# Altium PCB GatewayModbus.PcbDoc
Units mm, origin at the board's own origin, x right, y up, seen from the top; angles counter-clockwise.
Board outline 24 x 53 mm, 2 copper layers (Top Layer, Bottom Layer); 60 components, 41 nets, 170 pads, 145 vias.
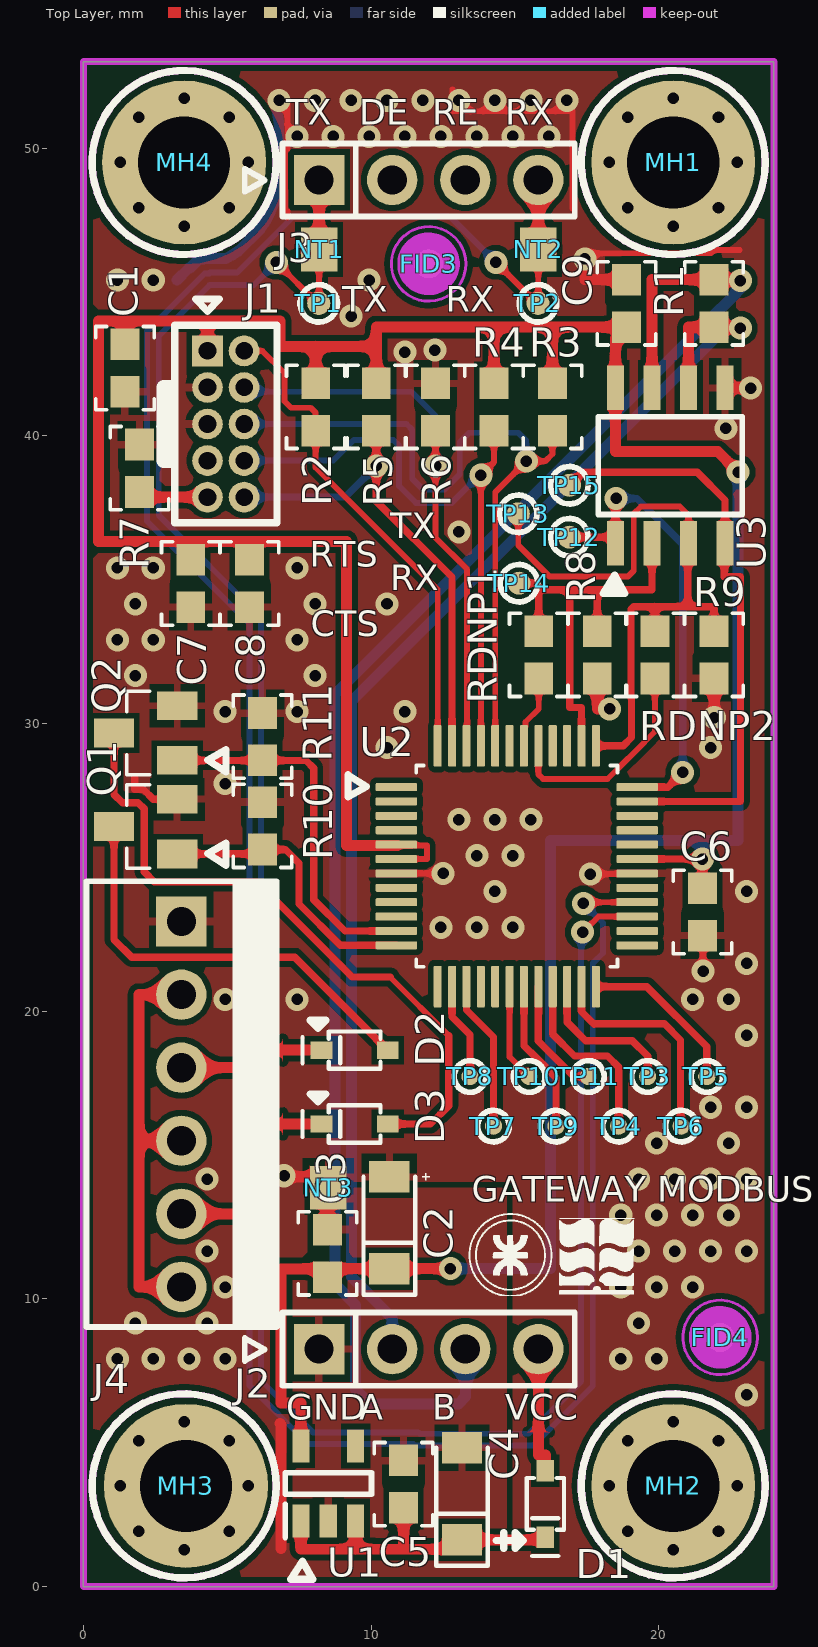
[diagram p0: Top Layer view]
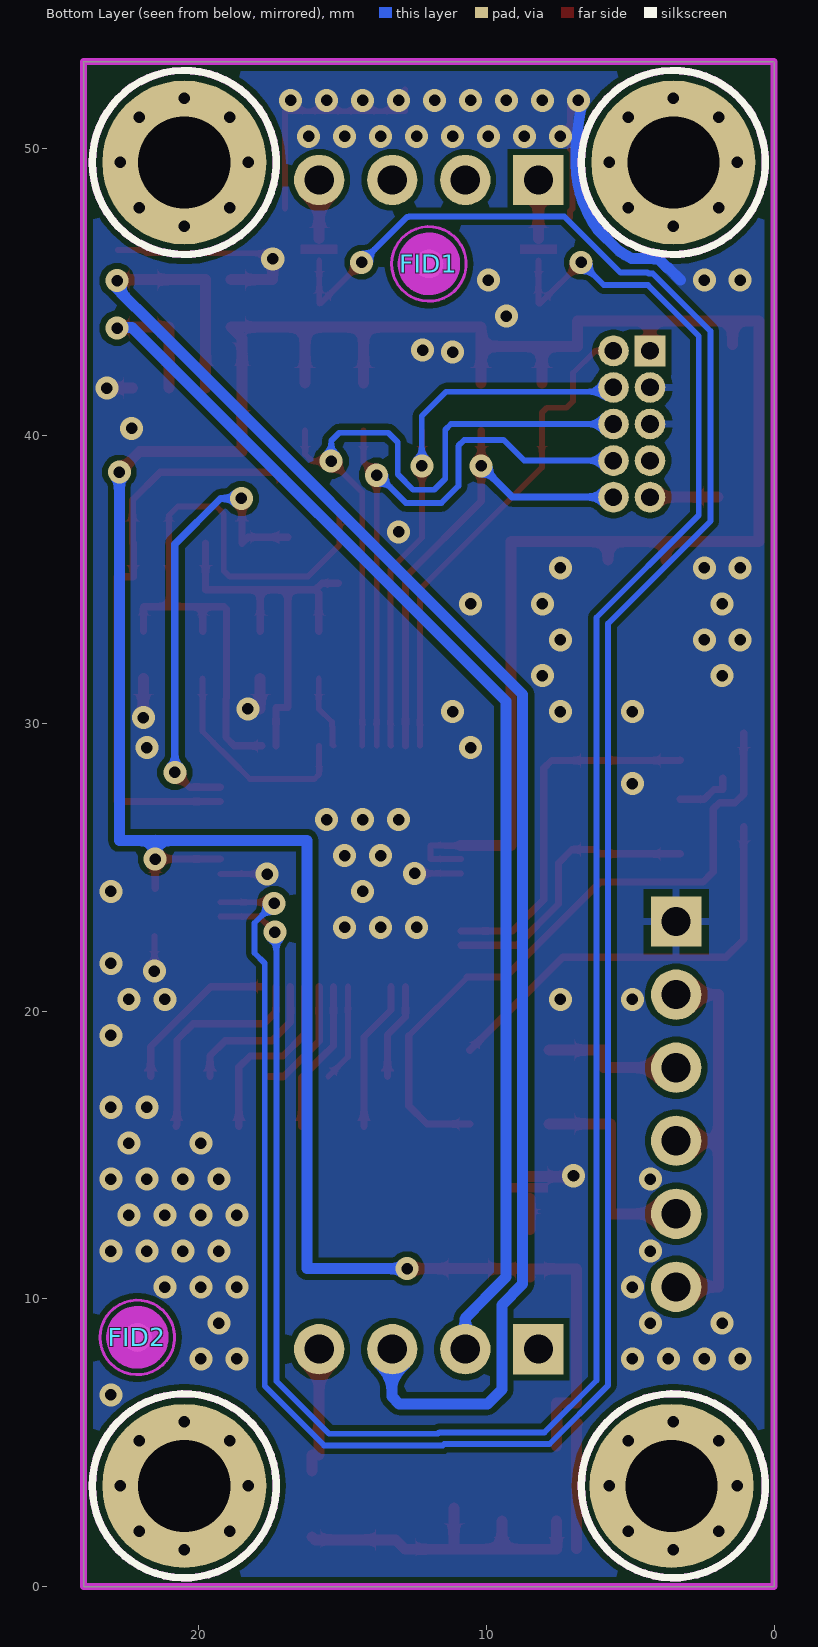
[diagram p1: Bottom Layer view, seen from below]

## Layer stack, top to bottom
Top Solder: solder mask 0.0102, Solder Resist, Dk 3.5
Top Layer: signal copper 0.0356
Dielectric 1: dielectric 0.32, FR-4, Dk 4.8
Bottom Layer: signal copper 0.0356
Bottom Solder: solder mask 0.0102, Solder Resist, Dk 3.5

## Board outline
0,0 0,53 24.003,53 24,53 24,0

## Design rules (kind name [scope] priority, off if disabled: settings)
Clearance [All] p1: gap=0.203 ignorepadtopadclearanceinfootprint=TRUE
PlaneClearance [All] p1: clearance=0.305
PlaneConnect [IsVia] p1: planeconnectstyle=Direct reliefexpansion=0.508 reliefentries=4 reliefconductorwidth=0.254 reliefairgap=0.254
PlaneConnect PlaneConnect_1 [All] p2: planeconnectstyle=Relief reliefexpansion=0.508 reliefentries=4 reliefconductorwidth=0.254 reliefairgap=0.254
PolygonConnect [All] p1: thpad.connectstyle=Relief thpad.reliefconductorwidth=0.254 thpad.reliefentries=4 thpad.polygonreliefangle="90 Angle" thpad.airgapwidth=0.254 smdpad.connectstyle=Relief smdpad.reliefconductorwidth=0.254 smdpad.reliefentries=4 smdpad.polygonreliefangle="90 Angle" smdpad.airgapwidth=0.254 via.connectstyle=Direct via.reliefconductorwidth=0.254 via.reliefentries=4 via.polygonreliefangle="90 Angle" via.airgapwidth=0.254
RoutingVias [All] p1: holewidth=0.711 width=1.27 viastyle="Through Hole" minholewidth=0.711 minwidth=1.27 maxholewidth=0.711 maxwidth=1.27 useviatemplates=TRUE viatemplateguid#1={3A806ADE-E63A-4A2F-AADA-EE6A29EC5604} viatemplatename#1=v80h40m0mx0
SolderMaskExpansion [All] p1: expansion=0.102 istentingtop=FALSE
Width [All] p1: maxlimit=0.381 minlimit=0.203 preferedwidth=0.254
28 further rules are at their usual default settings.

## Components (designator, comment, footprint, x,y, rotation, side; value= is the part's Value field where it differs from the comment)
C1 "100nF 16 X7R" CAPC0603 1.441,42.352 r90 top
C2 "10uF/16V" "CAP POL TANT 1206" 10.632,12.644 r270 top
C3 "100nF 16 X7R" CAPC0603 8.48,11.581 r270 top
C4 "10uF/16V" "CAP POL TANT 1206" 13.157,3.225 r270 top
C5 "100nF 16 X7R" CAPC0603 11.125,3.558 r270 top
C6 "100nF 16 X7R" CAPC0603 21.514,23.444 r90 top
C7 "100nF 16 X7R" CAPC0603 3.727,34.863 r90 top
C8 "100nF 16 X7R" CAPC0603 5.771,34.863 r90 top
C9 "100nF 16 X7R" CAPC0603 18.876,44.602 r90 top
D1 "1N4148" SOD323 16.053,2.87 r90 top
D2 "1N4148" SOD323 9.423,18.644 r0 top
D3 "1N4148" SOD323 9.423,16.078 r0 top
FID1 "Fiducial" Fiducial10-20 11.995,45.974 r90 bottom
FID2 "Fiducial" Fiducial10-20 22.13,8.658 r90 bottom
FID3 "Fiducial" Fiducial10-20 11.995,45.974 r90 top
FID4 "Fiducial" Fiducial10-20 22.13,8.658 r90 top
J1 "HEADER5x2-1.27mm" PAD10-2X05-HH 4.311,42.948 r270 top
J2 "PIN4" SIP4 12,8.252 r0 top locked
J3 "PIN4" SIP4 12,48.892 r0 top locked
J4 "MOLEX6" MOLEX6 3.404,23.114 r270 top
MH1 "M3 Mount Hole" M3_MOUNTING_HOLE#1 20.5,49.5 r0 top locked
MH2 "M3 Mount Hole" M3_MOUNTING_HOLE#1 20.5,3.5 r0 top locked
MH3 "M3 Mount Hole" M3_MOUNTING_HOLE#2 3.5,3.5 r0 top locked
MH4 "M3 Mount Hole" M3_MOUNTING_HOLE#1 3.5,49.5 r0 top locked
NT1 "Net-Tie" Net-Tie_50milWide_30milLong 8.19,46.479 r90 top net-tie
NT2 "Net-Tie" Net-Tie_50milWide_30milLong 15.81,46.479 r90 top net-tie
NT3 "Net-Tie" Net-Tie_50milWide_30milLong 8.505,13.863 r90 top net-tie
Q1 "AO3400A" SOT-23 2.157,26.416 r90 top
Q2 "AO3400A" SOT-23 2.157,29.667 r90 top
R1 "120.0 - 5%" RESC0603 21.917,44.602 r90 top
R2 "10.0K - 5%" RESC0603 8.071,41.003 r270 top
R3 "10.0K - 5%" RESC0603 16.3,41.003 r270 top
R4 "10.0K - 5%" RESC0603 14.268,41.003 r270 top
R5 "10.0K - 5%" RESC0603 10.179,41.003 r270 top
R6 "10.0K - 5%" RESC0603 12.236,41.003 r270 top
R7 "10.0K - 5%" RESC0603 1.949,38.872 r270 top
R8 "10.0K - 5%" RESC0603 17.86,32.385 r90 top
R9 "10.0K - 5%" RESC0603 21.917,32.385 r90 top
R10 "10.0K - 5%" RESC0603 6.223,26.441 r90 top
R11 "10.0K - 5%" RESC0603 6.223,29.54 r90 top
RDNP1 "10.0K - 5%" RESC0603 15.824,32.385 r90 top
RDNP2 "10.0K - 5%" RESC0603 19.863,32.385 r270 top
TP1 "" TP_SMD_Ø1.0mm 8.178,44.602 r180 top
TP2 "" TP_SMD_Ø1.0mm 15.798,44.602 r180 top
TP3 "" TP_SMD_Ø0.6mm 19.609,17.729 r180 top
TP4 "" TP_SMD_Ø0.6mm 18.601,16.002 r180 top
TP5 "" TP_SMD_Ø0.6mm 21.666,17.729 r180 top
TP6 "" TP_SMD_Ø0.6mm 20.777,16.002 r180 top
TP7 "" TP_SMD_Ø0.6mm 14.249,16.002 r180 top
TP8 "" TP_SMD_Ø0.6mm 13.437,17.729 r180 top
TP9 "" TP_SMD_Ø0.6mm 16.425,16.002 r180 top
TP10 "" TP_SMD_Ø0.6mm 15.494,17.729 r180 top
TP11 "" TP_SMD_Ø0.6mm 17.551,17.729 r180 top
TP12 "" TP_SMD_Ø1.0mm 16.891,36.474 r90 top
TP13 "" TP_SMD_Ø1.0mm 15.113,37.287 r90 top
TP14 "" TP_SMD_Ø1.0mm 15.138,34.874 r90 top
TP15 "" TP_SMD_Ø1.0mm 16.891,38.278 r90 top
U1 "AP7335A-50W-7" SOT-23-5 8.509,3.581 r90 top
U2 "PS32K116LFF0MLCR" LQFP48-NXP 15.062,25.037 r0 top value=Value
U3 "MAX485ESA+T" SOIC8 20.396,38.964 r90 top

## Footprints (in the part's own frame and the unit in brackets; to place one, negate y for a bottom-side part, rotate by r counter-clockwise, add the part's x,y. Pads: shape width x height; smd on the part's side, far side on the other; paste and mask are expansions set on the pad)
"CAP POL TANT 1206" [mm] "SMD Tantalum Capacitor 1206"
  rect 1.1x1.4 smd mask+0.076: 1(1.6,0) 2(-1.6,0)
  silkscreen extent -1.73,-0.9 2.5,1.4, body extent -1.73,-0.9 1.67,0.9, height 1.81
CAPC0603 [mm] "SMD Chip Ceramic Capacitor 0603"
  rect 1.1x1 smd mask+0.051: 1(-0.825,0) 2(0.825,0)
  silkscreen extent -1.45,-1.02 1.45,1.02, body extent -0.75,-0.4 0.75,0.4, height 0.55
Fiducial10-20 [mm]
  round 1 smd mask+0.5: 1(0,0)
  Top Layer keep-out circle w1.178: c0,0 r0.5
  Keep-Out Layer circle w0.1: c0,0 r1.296
LQFP48-NXP [mm]
  rrect25% 1.44x0.28 smd: 1(-4.185,2.75) 2(-4.185,2.25) 3(-4.185,1.75) 4(-4.185,1.25) 5(-4.185,0.75) 6(-4.185,0.25) 7(-4.185,-0.25) 8(-4.185,-0.75) 9(-4.185,-1.25) 10(-4.185,-1.75) 11(-4.185,-2.25) 12(-4.185,-2.75) 25(4.185,-2.75) 26(4.185,-2.25) 27(4.185,-1.75) 28(4.185,-1.25) 29(4.185,-0.75) 30(4.185,-0.25) 31(4.185,0.25) 32(4.185,0.75) 33(4.185,1.25) 34(4.185,1.75) 35(4.185,2.25) 36(4.185,2.75)
  rrect25% 0.28x1.44 smd: 13(-2.75,-4.185) 14(-2.25,-4.185) 15(-1.75,-4.185) 16(-1.25,-4.185) 17(-0.75,-4.185) 18(-0.25,-4.185) 19(0.25,-4.185) 20(0.75,-4.185) 21(1.25,-4.185) 22(1.75,-4.185) 23(2.25,-4.185) 24(2.75,-4.185) 37(2.75,4.185) 38(2.25,4.185) 39(1.75,4.185) 40(1.25,4.185) 41(0.75,4.185) 42(0.25,4.185) 43(-0.25,4.185) 44(-0.75,4.185) 45(-1.25,4.185) 46(-1.75,4.185) 47(-2.25,4.185) 48(-2.75,4.185)
  silkscreen extent -5.87,-3.5 3.5,3.5, body extent -4.5,-4.5 4.5,4.5, height 1.6
M3_MOUNTING_HOLE#1 [mm]
  round 5.7 hole 3.2: 1(0,0)
  Keep-Out Layer circle w0.254: c0,0 r3.2
  silkscreen extent -3.2,-3.2 3.2,3.2
M3_MOUNTING_HOLE#2 [mm]
  round 5.7 hole 3.2: 1(0.063,0)
  Keep-Out Layer circle w0.254: c0,0 r3.2
  silkscreen extent -3.2,-3.2 3.2,3.2
MOLEX6 [mm]
  rect 1.75x1.75 hole 1.016: 1(0,0)
  round 1.75 hole 1.016: 2(2.54,0) 3(5.08,0) 4(7.62,0) 5(10.16,0) 6(12.7,0)
  silkscreen extent -1.4,-3.3 14.1,3.3, body extent -1.27,-3.17 13.97,3.18, height 10.74
Net-Tie_50milWide_30milLong [mil]
  rect 30x50 smd paste-20 mask-20: 1(-15,0) 2(15,0)
  Top Layer region: -6,25 6,25 6,-25 -6,-25
PAD10-2X05-HH [mil] "Header 2x5 paso 0.05\""
  rect 42x42 hole 24: 1(0,0)
  round 42 hole 24: 2(0,50) 3(50,0) 4(50,50) 5(100,0) 6(100,50) 7(150,0) 8(150,50) 9(200,0) 10(200,50)
  silkscreen extent -71,-60 235,95, body extent -25,-33 225,85, height 185
RESC0603 [mm] "SMD Chip Resistor 0603"
  rect 1.1x1 smd mask+0.051: 1(-0.825,0) 2(0.825,0)
  silkscreen extent -1.45,-1.02 1.45,1.02, body extent -0.8,-0.4 0.8,0.4, height 0.38
SIP4 [mm]
  rect 1.75x1.75 hole 1.016: 1(-3.81,0)
  round 1.75 hole 1.016: 2(-1.27,0) 3(1.27,0) 4(3.81,0)
  silkscreen extent -6.4,-1.27 5.08,1.27, body extent -5.08,-1.27 5.08,1.27, height 8.38
SOD323 [mm]
  rect 0.75x0.6 smd paste-0.05 mask+0.051: A(1.151,0) K(-1.151,0)
  silkscreen extent -1.81,-0.65 0.9,1.04, body extent -1.26,-0.65 1.26,0.65, height 1.1
SOIC8 [mm]
  rect 1.55x0.6 smd mask+0.076: 1(-2.7,1.905) 2(-2.7,0.635) 3(-2.7,-0.635) 4(-2.7,-1.905) 5(2.7,-1.905) 6(2.7,-0.635) 7(2.7,0.635) 8(2.7,1.905)
  silkscreen extent -4.44,-2.5 1.7,2.5, body extent -3.05,-2.51 2.96,2.49, height 1.75
SOT-23 [mm]
  rect 1x1.4 smd: 1(-0.95,-1.1) 2(0.95,-1.1) 3(0,1.1)
  silkscreen extent -1.45,-2.79 1.45,0.65, body extent -1.46,-1.18 1.46,1.19, height 1.11
SOT-23-5 [mm]
  rect 1.15x0.6 smd mask+0.07: 1(-1.3,0.95) 2(-1.3,0) 3(-1.3,-0.95) 4(1.3,-0.95) 5(1.3,0.95)
  silkscreen extent -3.33,-1.5 0.38,1.5, body extent -1.43,-1.5 1.43,1.5, height 1.4
TP_SMD_Ø0.6mm [mm] "TEST POINT.  No entry in BOM."
  round 0.6 smd: 1(0,0)
  silkscreen extent -0.55,-0.55 0.55,0.55
TP_SMD_Ø1.0mm [mm] "TEST POINT.  No entry in BOM."
  round 0.8 smd paste-1: 1(0,0)
  silkscreen extent -0.65,-0.65 0.65,0.65

## Part data
C1 C3 C5 C6 C7 C8 C9: library part CAPC0603, "SMD Ceramic Chip Capacitor 0603"
C2 C4: library part "CAP POL TANT", "Polarized Capacitor Tantalium"
D1 D2 D3: "Small Signal Diode"
FID1 FID2 FID3 FID4: "Fiducial mark.  There is nothing to buy or mount.. No entry in BOM.", Manufacturer=N/A, ClassName=FiducialMark, CompType=Fiducial, LatestRevisionDate=2014-08-01, LatestRevisionNote="Added Alternate PartNumber and Alternate Manufacturer parameters to appropriate components.", MountType=N/A, PackageReference=Fiducial, PartNumber=N/A, Publisher="Texas Instruments", SymbolCreator=codlsc, SymbolVersion=2009-11-4
J1: "PAD10-2X05-HH"
MH1 MH2 MH3 MH4: "M3 Mounting Hole"
NT1 NT2 NT3: "Single point connection between nets.", LatestRevisionDate=2015-10-18, LatestRevisionNote="Added Alternate PartNumber and Alternate Manufacturer parameters to appropriate components.", MountType=SMT, PackageReference=N/A, Publisher="Texas Instruments", SymbolCreator=codlsc, SymbolVersion=2009-07-01
Q1 Q2: "30V 5.8A 35mΩ@10V,5.8A 1.4W 1.4V@250uA 1 N-Channel SOT-23 MOSFETs ROHS"
R1 R2 R3 R4 R5 R6 R7 R8 R9 R10 R11 RDNP1 RDNP2: library part "RESC 0603", "SMD Chip Resistor 0603"
TP1 TP2 TP3 TP4 TP5 TP6 TP7 TP8 TP9 TP10 TP11 TP12 TP13 TP14 TP15: library part TESTPOINT, "TEST POINT.  No entry in BOM.", CompType=Testpoint, LatestRevisionDate=2015-10-18, LatestRevisionNote="Added Alternate PartNumber and Alternate Manufacturer parameters to appropriate components.", PackageReference=N/A, Publisher="Texas Instruments", SymbolVersion=2010-10-20
U1: "IC REG LINEAR 5V 300MA SOT25"
U2: "Microcontroladores ARM - MCU S32K116, M0+, Flash 128K, RAM 17KB", Manufacturer_Part_Number=ps32k116lff0mlcr, Built_By=EMA_Jessica, Copyright="Copyright (C) 2016 Accelerated Designs. All rights reserved", RefDes=RefDes, Type=Type, Vendor=NXP
U3: "1/1 Transceiver Half RS422, RS485 8-SOIC", Package="SOIC-8 Maxim", Availability="In Stock", Check_prices=https://www.snapeda.com/parts/MAX485ESA/Maxim+Integrated/view-part/?ref=eda, MF="Maxim Integrated", MP=MAX485ESA, Price=None, Purchase-URL=https://pricing.snapeda.com/search/part/MAX485ESA/?ref=eda, SnapEDA_Link=https://www.snapeda.com/parts/MAX485ESA/Maxim+Integrated/view-part/?ref=snap

## Via types
v1: diameter 0.8, hole 0.4, Top Layer to Bottom Layer, 88 vias
v2: diameter 0.8, hole 0.4, Top Layer to Bottom Layer, tented both sides, 57 vias

## Nets (pads, with @x,y where several pads share a name; then routed paths per layer and width w, separated by ;. In a path a pad name is that pad's centre, name@x,y a point inside that pad or via, vN(x,y) a via of type N, cw(c..) or ccw(c..) an arc to the next point about the centre after c; other vN are vias at no path point)
A: J2.2 R1.1 U3.6 | length 45.9
  Top Layer w0.381: U3.6 21.031,43.777 R1.1 22.796,43.777 v2(22.835,43.739)
  Bottom Layer w0.381: J2.2 10.73,9.336 10.045,10.021 10.045,10.034 9.322,10.758 9.322,30.771 22.316,43.765 22.808,43.765 v2(22.835,43.739)
B: J2.3 R1.2 U3.7 | length 57.3
  Top Layer w0.381: U3.7 19.761,43.056 19.769,43.064 19.769,44.49 19.761,44.499 19.761,44.706 19.769,44.714 19.769,45.427 R1.2 22.797,45.427 v2(22.835,45.39)
  Bottom Layer w0.381: J2.3 13.284,8.238 13.284,6.604 13.03,6.35 9.957,6.35 9.461,6.846 9.461,8.778 9.461,9.792 8.738,10.516 8.738,30.658 8.738,31.013 22.074,44.349 22.276,44.552 22.835,45.11 v2(22.835,45.39)
BATT: D1.A J2.4 | length 4.5
  Top Layer w0.381: J2.4 15.81,4.57 16.053,4.57 D1.A
BGND: C3.1 C4.2 C5.1 J2.1 NT3.1 U1.2 | length 1.1
  Top Layer w0.381: C3.1 8.48,13.482 NT3.1
DE: J3.2
"FTM1 CH6 CTS": RDNP1.1 U2.42 | length 2.5
  Top Layer w0.203: U2.42 15.35,29.261 15.35,29.884 15.367,29.9 15.367,30.048 15.824,30.506 RDNP1.1
"FTM1 CH7 RTS": RDNP2.2 U2.41 | length 7.6
  Top Layer w0.203: U2.41 15.812,28.232 15.977,28.067 18.212,28.067 18.935,28.791 18.941,28.791 19.482,29.331 19.482,29.337 19.863,29.718 RDNP2.2
GND: C1.1 C2.2 C6.1 C7.1 C8.1 C9.2 J1.3 J1.5 J4.1 NT3.2 Q1.2 Q2.2 R6.1 R7.1 R8.1 R9.1 R10.2 R11.2 U2.7 U2.30 U3.5 | length 44.7
  Top Layer w0.203: 7.087,47.583 7.087,47.814 7.01,47.891 7.01,49.893 7.087,49.97 v1@7.087,51.649 ; U2.7 12.494,24.787 v2(12.497,24.79) ; 12.827,52.045 12.827,51.283 16.993,51.283 16.993,47.904 ; v2(17.424,46.152) 17.424,46.345 21.807,46.345 cw(c22.076,46.076) 22.076,46.457 22.809,46.457 ; v2@17.624,24.765 U2.30@19.241,24.765 ; v2@21.536,21.39 C6.1@21.536,22.619
  Top Layer w0.254: 1.778,28.092 1.778,27.703 2.083,27.703 2.421,27.366 Q1.2
  Top Layer w0.381: 6.833,5.664 6.858,5.639 6.858,1.321 ; v2(6.97,14.278) 6.97,14.244 NT3.2 ; v2(17.424,46.152) 17.424,45.427 C9.2 ; R8.1 17.86,30.505 v2(18.288,30.505) ; R9.1 21.925,31.56 v2(21.925,30.199) ; U3.5 23.19,41.664 v2(23.19,41.656)
  Bottom Layer w0.381: 3.251,45.415 3.66,45.824 ccw(c3.5,49.064) 3.698,45.826 4.011,46.139 4.164,46.139 4.189,46.164 4.955,46.164 ccw(c3.5,49.064) 5.396,46.432 6.132,47.168 ccw(c2.861,49.524) 6.883,49.795 ccw(c5.295,49.902) 6.883,50.007 ccw(c-4.745,49.245) 6.68,51.539 v1(6.8,51.659)
  other v1: 23.05,6.659 1.175,7.909 2.425,7.909 3.675,7.909 4.925,7.909 18.675,7.909 19.925,7.909 1.8,9.159 4.3,9.159 19.3,9.159 4.925,10.409 18.675,10.409 19.925,10.409 21.175,10.409 4.3,11.659 19.3,11.659 20.55,11.659 21.8,11.659 23.05,11.659 18.675,12.909 19.925,12.909 21.175,12.909 22.425,12.909 4.3,14.159 19.3,14.159 20.55,14.159 21.8,14.159 23.05,14.159 19.925,15.409 22.425,15.409 21.8,16.659 23.05,16.659 23.05,19.159 4.925,20.409 7.425,20.409 21.175,20.409 22.425,20.409 23.05,21.659 12.425,22.909 13.675,22.909 14.925,22.909 14.3,24.159 23.05,24.159 13.675,25.409 14.925,25.409 13.05,26.659 14.3,26.659 15.55,26.659 4.925,27.909 10.55,29.159 21.8,29.159 4.925,30.409 7.425,30.409 11.175,30.409 1.8,31.659 8.05,31.659 1.175,32.909 2.425,32.909 7.425,32.909 1.8,34.159 8.05,34.159 10.55,34.159 1.175,35.409 2.425,35.409 7.425,35.409 13.05,36.659 11.175,42.909 9.3,44.159 1.175,45.409 2.425,45.409 9.925,45.409 7.425,50.409 8.675,50.409 9.925,50.409 11.175,50.409 12.425,50.409 13.675,50.409 14.925,50.409 16.175,50.409 8.05,51.659 9.3,51.659 10.55,51.659 11.8,51.659 13.05,51.659 14.3,51.659 15.55,51.659 16.8,51.659
  other v2: 21.539,21.387 17.621,24.762 22.327,40.259 12.217,42.977
"GND SENSE": J1.9 R7.2 | length 2.4
  Top Layer w0.381: R7.2@1.949,37.868 J1.9
"LPUART0 CTS": R8.2 RDNP1.2 TP14.1 U2.38 U3.2 | length 15.1
  Top Layer w0.254: TP14.1 15.714,34.874 15.942,34.646 ; RDNP1.2 15.824,34.527 15.942,34.646 ; U2.38 17.312,30.556 16.901,30.556 16.901,34.646 ; R8.2 17.86,34.646 ; U3.2 19.761,34.646 17.86,34.646 ; 15.942,34.646 16.901,34.646 ; 16.901,34.646 17.86,34.646
"LPUART0 RTS": R9.2 RDNP2.1 TP13.1 U2.37 U3.3 | length 23.4
  Top Layer w0.203: TP13.1 15.113,36.195 16.205,35.103 18.923,35.103 19.126,35.306 19.126,37.287 19.38,37.541 20.726,37.541 21.031,37.236 U3.3
  Top Layer w0.254: U2.37 18.762,29.222 19.05,29.51 19.05,30.856 19.033,30.873 19.033,33.97 19.124,34.061 19.863,34.061 ; RDNP2.1 19.863,34.061 ; U3.3 21.006,36.264 21.006,34.061 ; R9.2 21.917,34.061 21.006,34.061 ; 19.863,34.061 21.006,34.061
"LPUART0 RX": TP12.1 U2.36 U3.1 | length 16
  Top Layer w0.254: TP12.1 18.28,36.474 U3.1 18.491,37.821 v2(18.517,37.821) ; U2.36 20.32,27.787 v2(20.828,28.296)
  Bottom Layer w0.254: v2(18.517,37.821) 19.238,37.821 20.828,36.231 v2(20.828,28.296)
"LPUART0 TX": TP15.1 U2.35 U3.4 | length 20.7
  Top Layer w0.254: TP15.1 17.348,38.735 21.336,38.735 22.301,37.77 U3.4 22.276,36.264 22.276,35.103 22.835,35.103 22.835,27.287 U2.35
"LPUART1 RX": NT2.1 TP2.1 U2.28 | length 88.8
  Top Layer w0.203: v2(14.332,46.031) TP2.1@15.754,44.609 ; TP2.1 15.81,44.615 NT2.1 ; v2(17.374,23.749) 17.412,23.787 U2.28
  Bottom Layer w0.203: v2(14.332,46.031) 12.763,47.6 12.704,47.6 12.679,47.624 7.289,47.624 5.334,45.669 4.394,45.669 4.369,45.644 4.216,45.644 2.21,43.637 2.21,37.033 5.766,33.477 5.766,6.994 7.807,4.953 11.465,4.953 11.516,4.902 15.637,4.902 17.704,6.969 17.704,21.666 18.059,22.022 18.059,23.063 v2(17.374,23.749)
"LPUART1 TX": NT1.1 TP1.1 U2.27 | length 77
  Top Layer w0.203: v2@6.756,46.076 v2(6.706,46.025) 8.128,44.602 TP1.1 8.19,44.615 NT1.1 ; v2(17.348,22.746) 17.348,22.758 17.634,23.044 17.666,23.044 17.909,23.287 U2.27
  Bottom Layer w0.203: v2(6.706,46.025) 5.918,45.237 4.385,45.237 2.616,43.469 2.616,37.236 6.172,33.68 6.172,7.163 7.976,5.359 11.633,5.359 11.684,5.309 15.469,5.309 17.297,7.137 17.297,17.364 17.297,22.708 17.342,22.752 v2(17.348,22.746)
NetC4_1: C4.1 C5.2 D1.K U1.1 U1.3 | length 12.1
  Top Layer w0.381: U1.1 7.559,1.295 9.459,1.295 ; U1.3 9.459,1.295 ; C5.2 11.125,1.314 11.144,1.295 ; D1.K 15.958,1.625 C4.1 12.828,1.295 11.144,1.295 ; 9.459,1.295 11.144,1.295
NetD2_A: D2.A Q1.3 | length 15
  Top Layer w0.254: Q1.3 1.057,22.489 1.676,21.869 7.348,21.869 D2.A
NetD2_K: D2.K J4.3 | length 5
  Top Layer w0.381: J4.3 5.918,18.034 5.918,18.644 7.825,18.644
NetD3_A: D3.A Q2.3 | length 23.4
  Top Layer w0.203: 10.668,21.184 10.668,21.172 12.7,19.14
  Top Layer w0.254: Q2.3 1.057,27.543 1.354,27.246 1.894,27.246 2.108,27.032 2.108,24.841 2.464,24.486 6.045,24.486 9.347,21.184 10.668,21.184 ; D3.A 12.065,16.078 12.7,16.713 12.7,19.14
NetD3_K: D3.K J4.5 | length 7.5
  Top Layer w0.381: J4.5 5.69,12.954 5.69,16.078 7.825,16.078
NetTP3_1: TP3.1 U2.22 | length 5.2
  Top Layer w0.254: U2.22 16.812,19.612 17.45,18.974 19.075,18.974 19.609,18.44 TP3.1
NetTP4_1: TP4.1 U2.21 | length 6.5
  Top Layer w0.254: U2.21 16.312,19.198 17.069,18.44 18.212,18.44 18.601,18.051 TP4.1
NetTP5_1: TP5.1 U2.24 | length 5.8
  Top Layer w0.254: U2.24 19.584,20.852 21.666,18.771 TP5.1
NetTP6_1: TP6.1 U2.23 | length 7.8
  Top Layer w0.254: U2.23 17.312,19.976 17.755,19.533 17.78,19.558 20.193,19.558 20.752,18.999 20.752,16.027 TP6.1
NetTP7_1: TP7.1 U2.15 | length 5.2
  Top Layer w0.254: U2.15 13.312,20.039 14.249,19.101 TP7.1
NetTP8_1: TP8.1 U2.14 | length 3.4
  Top Layer w0.254: U2.14 12.812,19.802 13.437,19.177 TP8.1
NetTP9_1: TP9.1 U2.19 | length 5.3
  Top Layer w0.254: U2.19 15.312,18.801 15.753,18.359 15.755,18.359 16.425,17.689 TP9.1
NetTP10_1: TP10.1 U2.18 | length 3.4
  Top Layer w0.203: U2.18 14.812,18.412 TP10.1
NetTP11_1: TP11.1 U2.20 | length 4.1
  Top Layer w0.254: U2.20 15.812,18.961 17.043,17.729 TP11.1
PTD15: Q2.1 R11.1 U2.11 | length 12.8
  Top Layer w0.254: Q2.1 3.259,28.715 R11.1 7.734,28.715 8.001,28.448 8.001,23.876 9.09,22.787 U2.11
PTE9: Q1.1 R10.1 U2.12 | length 9.9
  Top Layer w0.254: Q1.1 6.073,25.466 R10.1 7.023,25.616 7.493,25.146 7.493,23.724 8.929,22.287 U2.12
R\E\S\E\T\: J1.10 R5.2 U2.47 | length 17.1
  Top Layer w0.254: R5.2 v2(10.179,38.952) 10.179,37.726 12.812,35.093 U2.47
  Bottom Layer w0.254: J1.10 9.095,37.868 v2(10.179,38.952)
RE: J3.3
RX: J3.4 NT2.2 | length 2
  Top Layer w0.381: NT2.2 J3.4
"SWD CLK": J1.4 R6.2 U2.46 | length 20.2
  Top Layer w0.203: R6.2 12.236,36.456 13.335,35.357 13.335,29.246 U2.46
  Bottom Layer w0.203: J1.4 5.73,41.529 11.405,41.529 12.243,40.691 v2(12.243,38.952)
"SWD DIO": J1.2 R2.2 U2.48 | length 17.3
  Top Layer w0.203: J1.2 6.218,42.948 6.985,42.182 6.985,41.732 6.985,41.199 7.21,40.974 7.444,40.974 7.896,40.974 8.071,40.799 R2.2 8.071,38.894 12.312,34.653 U2.48
SWO: J1.6 R3.2 U2.44 | length 26.2
  Top Layer w0.203: U2.44 14.312,38.035 v2(15.392,39.116) 16.053,39.116 16.3,39.363 R3.2
  Bottom Layer w0.203: J1.6 11.23,40.408 11.43,40.208 11.43,38.506 11.811,38.125 12.548,38.125 13.081,38.659 13.081,39.776 13.411,40.107 15.113,40.107 15.392,39.827 v2(15.392,39.116)
TDI: J1.8 R4.2 U2.45 | length 21.8
  Top Layer w0.203: U2.45 v2(13.812,38.627) 14.268,39.084 R4.2
  Bottom Layer w0.203: J1.8 8.684,39.138 9.398,39.853 10.77,39.853 10.973,39.649 10.973,38.252 11.557,37.668 12.802,37.668 13.761,38.627 v2(13.812,38.627)
TX: J3.1 NT1.2 | length 2
  Top Layer w0.381: NT1.2 J3.1
VDD: C1.2 C2.1 C3.2 C6.2 C7.2 C8.2 C9.1 J1.1 R2.1 R3.1 R4.1 R5.1 U1.5 U2.5 U2.6 U2.31 U3.8 | length 124.2
  Top Layer w0.203: U2.6 11.938,25.287 11.938,25.754 U2.5@10.922,25.754
  Top Layer w0.254: U2.31 v2(21.514,25.287) C6.2
  Top Layer w0.381: C1.2 1.441,43.993 ; C7.2 3.759,35.688 3.759,36.322 ; J1.1 4.311,43.993 ; C8.2 5.771,36.322 ; U1.5 7.559,6.382 6.869,6.382 6.869,11.044 C3.2@8.48,11.044 ; R2.1 8.071,43.104 ; C3.2 8.773,11.049 C2.1@10.627,11.049 ; R5.1 10.179,43.104 ; C2.1@10.636,11.049 v2(12.751,11.049) ; U2.5@10.922,25.754 10.014,25.754 10.012,25.756 9.144,25.756 9.144,36.322 5.771,36.322 ; R4.1 14.268,43.777 ; R3.1 16.3,43.777 ; v2(22.758,38.735) 22.047,39.446 18.491,39.446 U3.8 18.491,43.393 C9.1 16.3,43.777 ; 1.441,43.993 0.521,43.993 0.521,36.322 3.759,36.322 ; 1.441,43.993 4.311,43.993 ; 3.759,36.322 5.771,36.322 ; 4.311,43.993 6.833,43.993 6.833,43.104 8.071,43.104 ; 8.071,43.104 10.179,43.104 ; 10.179,43.104 10.179,43.777 14.268,43.777 ; 14.268,43.777 16.3,43.777
  Bottom Layer w0.381: v2(12.751,11.049) 16.231,11.049 16.231,25.933 21.514,25.933 ; v2(21.514,25.287) 21.514,25.933 ; v2(22.758,38.735) 22.758,25.933 21.514,25.933
VEXT: J4.2 J4.4 J4.6 | length 14.6
  Top Layer w0.381: J4.6 1.93,10.414 1.93,15.494 ; J4.4 1.93,15.494 ; J4.2 1.93,20.574 1.93,15.494
pads on no net: FID1.1 FID2.1 FID3.1 FID4.1 J1.7 MH1.1 MH2.1 MH3.1 MH4.1 U1.4 U2.1 U2.2 U2.3 U2.4 U2.8 U2.9 U2.10 U2.13 U2.16 U2.17 U2.25 U2.26 U2.29 U2.32 U2.33 U2.34 U2.39 U2.40 U2.43
copper on no net:
  other v2: 3.5,1.275 20.5,1.275 1.927,1.927 5.073,1.927 18.927,1.927 22.073,1.927 1.275,3.5 5.725,3.5 18.275,3.5 22.725,3.5 1.927,5.073 5.073,5.073 18.927,5.073 22.073,5.073 3.5,5.725 20.5,5.725 3.5,47.275 20.5,47.275 1.927,47.927 5.073,47.927 18.927,47.927 22.073,47.927 1.275,49.5 5.725,49.5 18.275,49.5 22.725,49.5 1.927,51.073 5.073,51.073 18.927,51.073 22.073,51.073 3.5,51.725 20.5,51.725

## Polygon pours and split planes (outlines as drawn)
GND on Top Layer "GND_L01_P002" (solid, remove dead copper, pour order 2): 0,53.01 24.003,53.01 24.003,0 0,0
BGND on Top Layer "BGND_L01_P001" (solid, remove dead copper, pour order 1): 7.242,13.868 14.707,13.868 14.707,1.295 7.288,1.295
GND on Bottom Layer "GND_L02_P003" (solid, remove dead copper, pour order 3): -0.025,52.984 -0.025,0 24.003,0 24.003,52.984

## Keep-outs
Keep-Out Layer:
  lines w0.254: 0,0 0,53.01 24.003,53.01 24.003,0 0,0

## Silkscreen, mask and mechanical layers (free items; w line width, h text height)
Top Overlay:
  drawing of 10 lines, arcs and shapes, not listed
  text "TX" at 7.043,50.513 h1.52
  text "DE" at 9.583,50.513 h1.52
  text "RE" at 12.123,50.513 h1.52
  text "RX" at 14.663,50.513 h1.52
  text "TX" at 8.987,44.014 h1.52
  text "RX" at 12.594,44.014 h1.52
  text "TX" at 10.665,36.139 h1.52
  text "RTS" at 7.871,35.148 h1.52
  text "RX" at 10.665,34.335 h1.52
  text "CTS" at 7.896,32.735 h1.52
  text "GATEWAY MODBUS" at 13.487,13.081 h1.52
  text "GND" at 7.043,5.504 h1.52
  text "A" at 9.583,5.504 h1.52
  text "B" at 12.123,5.504 h1.52
  text "VCC" at 14.663,5.504 h1.52
Mechanical 1:
  lines w0.254: 24,53 24,0 0,0 0,53 24.003,53